# Altium PCB Servo control board.PcbDoc
Units mm, origin at the board's own origin, x right, y up, seen from the top; angles counter-clockwise.
Board outline 61.24 x 50 mm, 2 copper layers (Top Layer, Bottom Layer); 45 components, 60 nets, 190 pads, 0 vias.
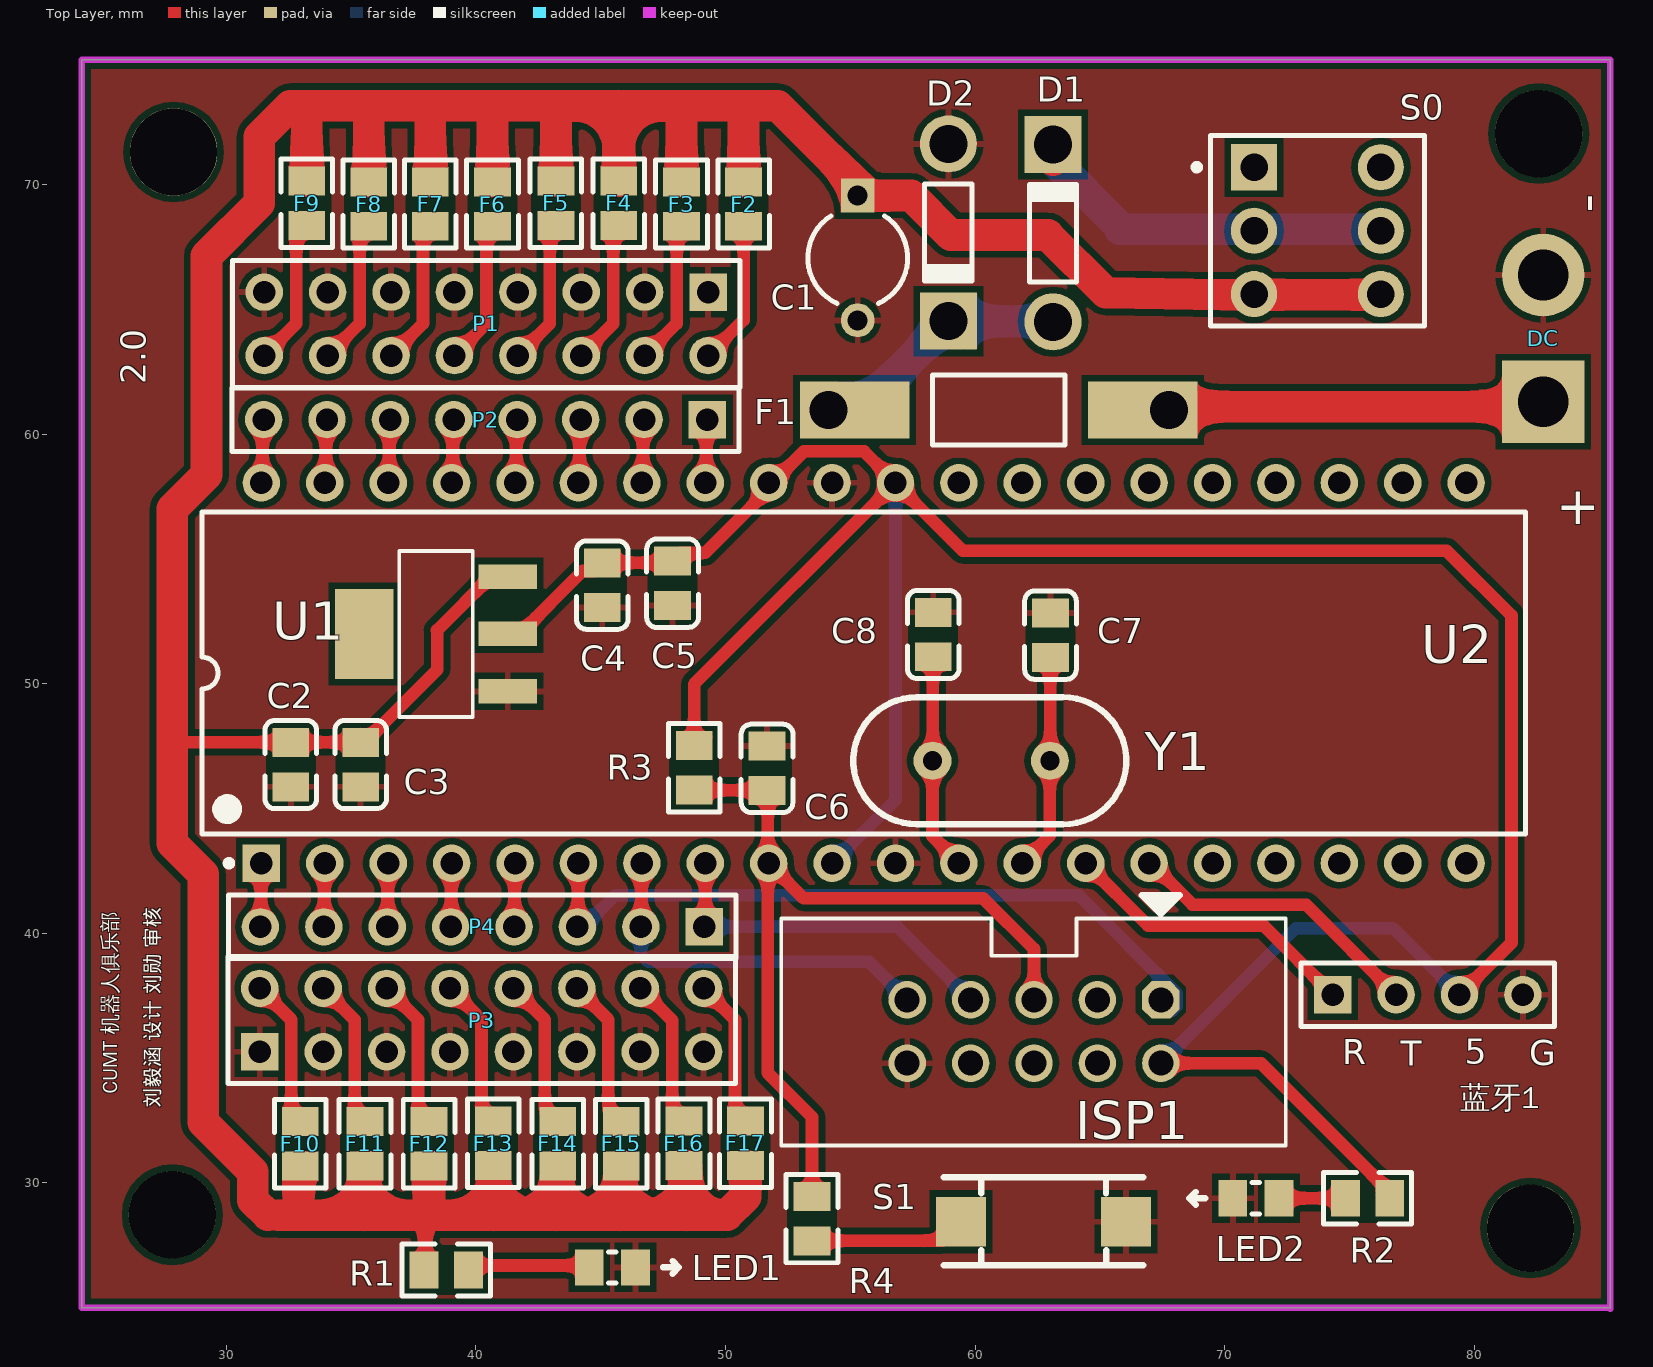
[diagram p0: Top Layer view]
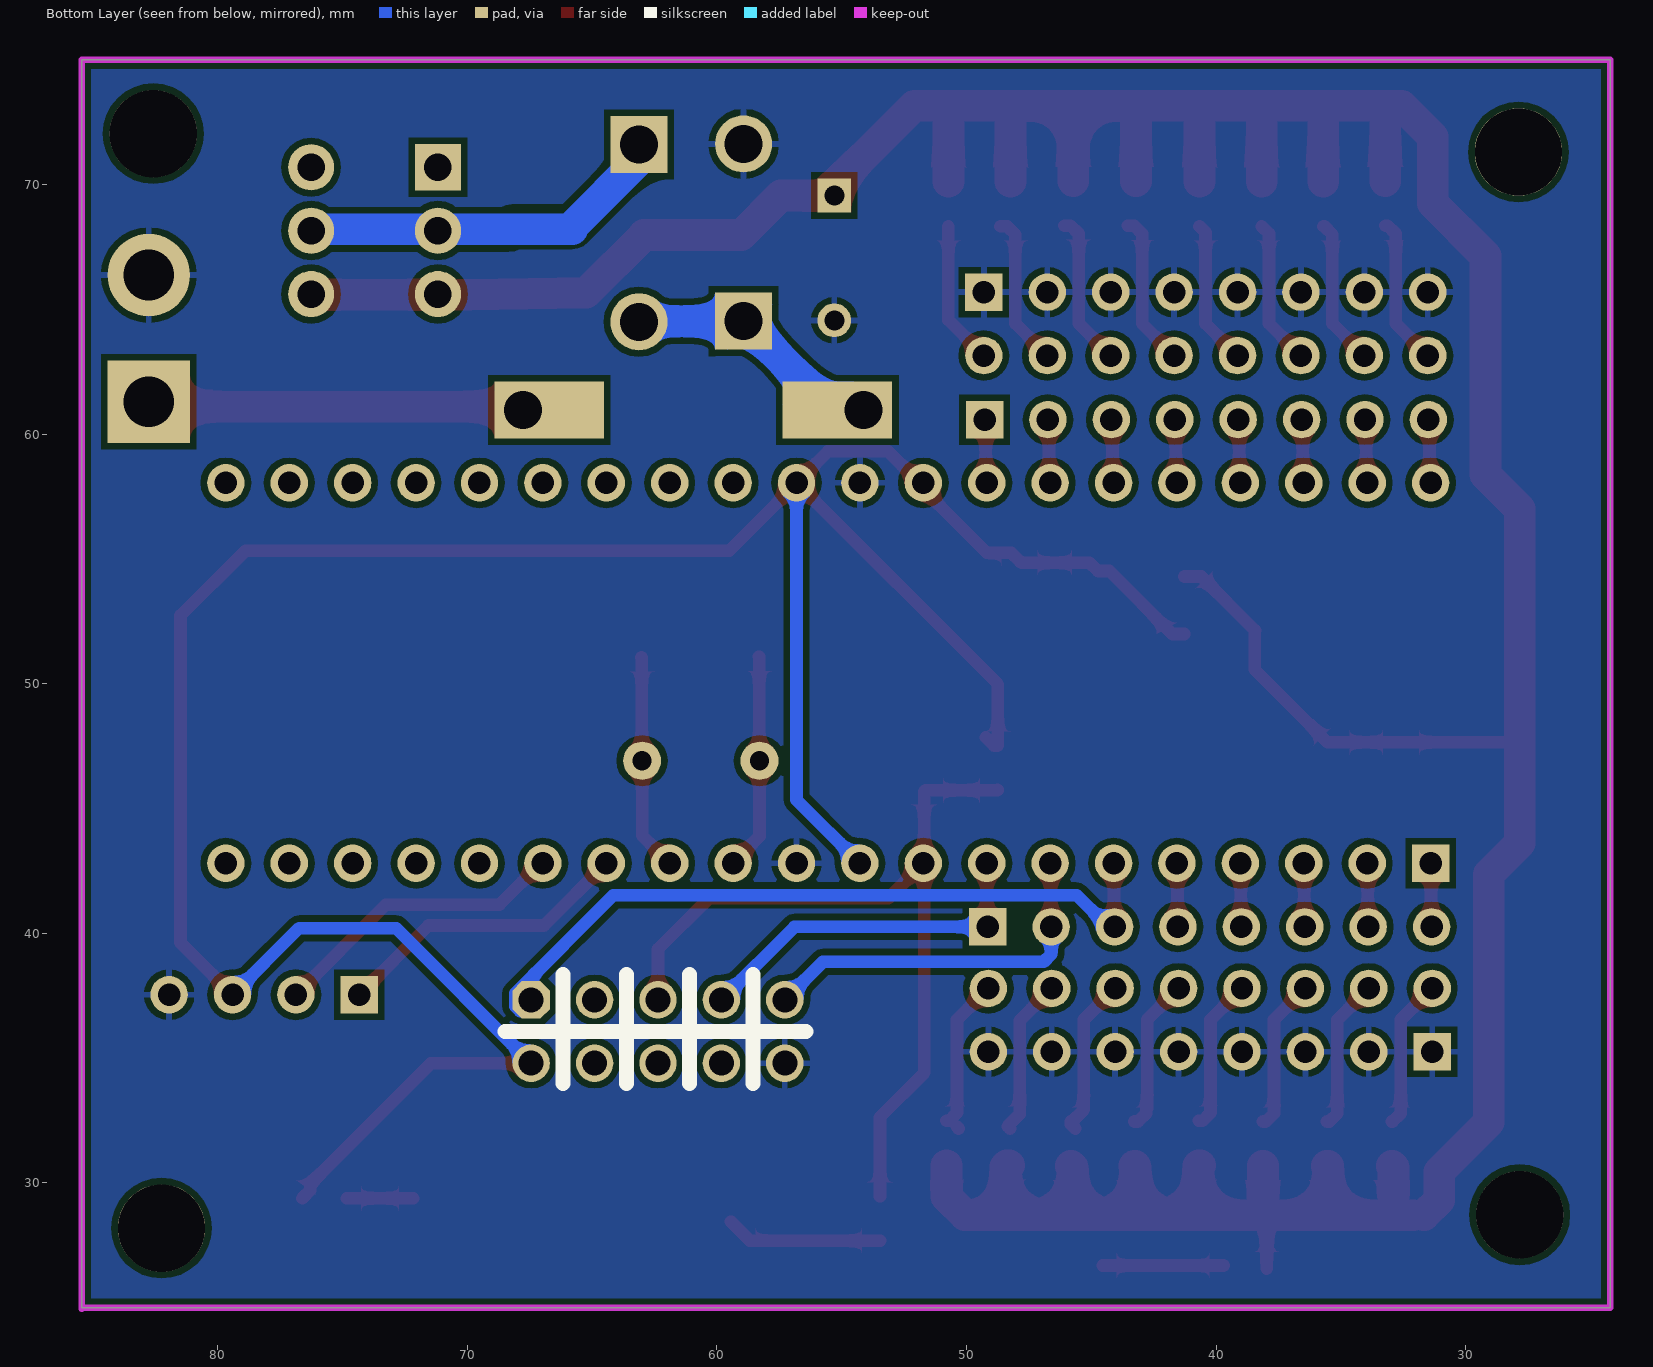
[diagram p1: Bottom Layer view, seen from below]
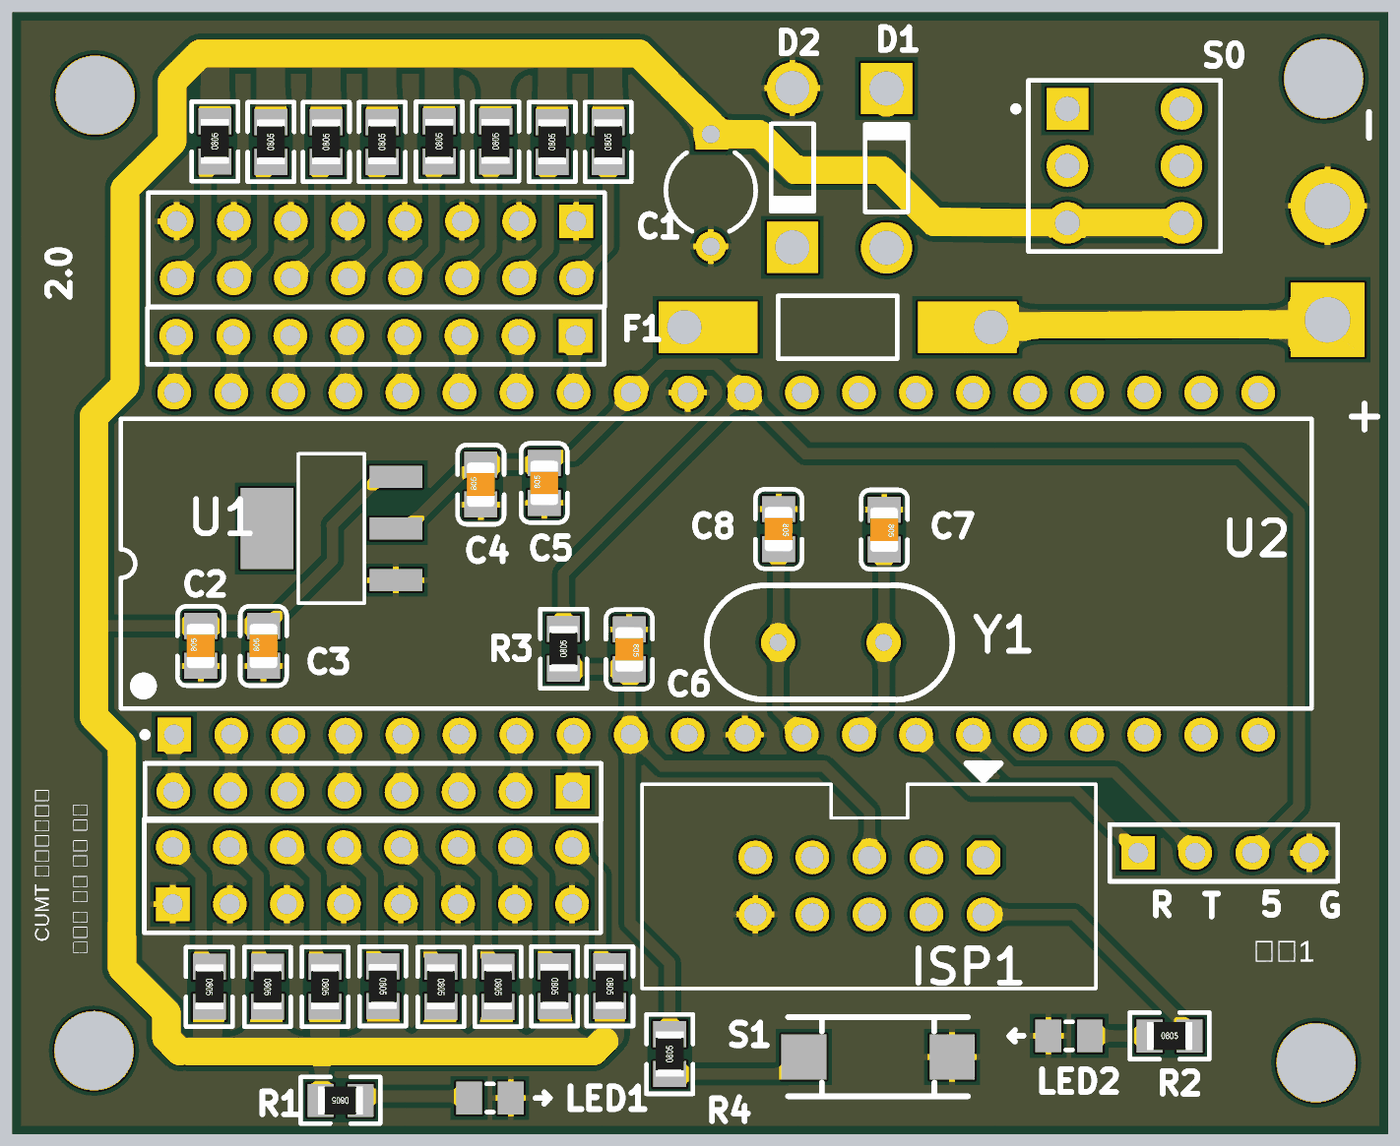
[diagram p2: 3D render of the assembled board from above, using the file's embedded part models]

## Layer stack, top to bottom
Top Solder: solder mask 0.0102, Solder Resist, Dk 3.5
Top Layer: signal copper 0.0356
Dielectric 1: dielectric 0.32, FR-4, Dk 4.8
Bottom Layer: signal copper 0.0356
Bottom Solder: solder mask 0.0102, Solder Resist, Dk 3.5

## Board outline
24.206,25 24.206,75 85.446,75 85.446,25

## Design rules (kind name [scope] priority, off if disabled: settings)
Clearance [All] p1: gap=0.254 ignorepadtopadclearanceinfootprint=TRUE
PolygonConnect [All] p1: connectstyle=Relief reliefconductorwidth=0.254 reliefentries=4 polygonreliefangle="90 Angle" airgapwidth=0.254
RoutingVias [All] p1: holewidth=0.711 width=1.27 viastyle="Through Hole" minholewidth=0.711 minwidth=1.27 maxholewidth=0.711 maxwidth=1.27
SolderMaskExpansion [All] p1: expansion=0.102
Width [All] p1: maxlimit=2.54 minlimit=0.254 preferedwidth=1.27 checkconnectedcopper=TRUE
30 further rules are at their usual default settings.

## Classes and differential pairs
component class 舵机控制板: C2 C3 C4 C5 C6 C7 C8 D1 D2 DC F1 F2 F3 F4 F5 F6 F7 F8 F9 F10 F11 F12 F13 F14 F15 F16 ISP1 LED1 LED2 P1 P2 P3 P4 R1 R2 R3 R4 S0 S1 U1 Y1 蓝牙1

## Components (designator, comment, footprint, x,y, rotation, side; value= is the part's Value field where it differs from the comment)
C1 "直插" CAPR5-4X5 55.296,67.056 r270 top value=470uf
C2 "10uf 0805" 0805_C 32.588,46.761 r90 top
C3 "104 0805" 0805_C 35.382,46.761 r90 top
C4 "104 0805" 0805_C 45.06,53.95 r90 top
C5 "10uf 0805" 0805_C 47.879,54.026 r90 top
C6 "10uf 0805" 0805_C 51.664,46.608 r270 top
C7 "22pf 0402" 0805_C 63.017,51.944 r270 top
C8 "22pf 0402" 0805_C 58.318,51.969 r270 top
D1 "Diode 1N4448" DO-35 63.119,68.047 r90 top
D2 "Schottky Diode SR560 直插" DO-35 58.928,68.072 r270 top
DC "接线端子" 接线端子-仅空 82.753,61.29 r90 top
F1 "玻璃管保险丝 3A" PIN-W2/E2.8 59.944,60.96 r180 top
F2 "500MA 0805" 0805_R 50.724,69.215 r90 top
F3 "500MA 0805" 0805_R 48.235,69.215 r90 top
F4 "500MA 0805" 0805_R 45.72,69.24 r90 top
F5 "500MA 0805" 0805_R 43.205,69.24 r90 top
F6 "500MA 0805" 0805_R 40.665,69.215 r90 top
F7 "500MA 0805" 0805_R 38.176,69.215 r90 top
F8 "500MA 0805" 0805_R 35.712,69.215 r90 top
F9 "500MA 0805" 0805_R 33.223,69.24 r90 top
F10 "500MA 0805" 0805_R 32.969,31.572 r270 top
F11 "500MA 0805" 0805_R 35.56,31.572 r270 top
F12 "500MA 0805" 0805_R 38.125,31.572 r270 top
F13 "500MA 0805" 0805_R 40.691,31.598 r270 top
F14 "500MA 0805" 0805_R 43.282,31.572 r270 top
F15 "500MA 0805" 0805_R 45.822,31.572 r270 top
F16 "500MA 0805" 0805_R 48.336,31.598 r270 top
F17 "500MA 0805" 0805_R 50.8,31.598 r270 top
ISP1 "IDC-10P" IDC2.54-10P 67.437,37.338 r180 top
LED1 "0805" LED贴片 45.466,26.619 r0 top
LED2 "0402" LED贴片 71.247,29.388 r180 top
P1 "Header 8X2" HDR2X8 49.301,65.684 r180 top
P2 "Header 8" HDR1X8 49.276,60.579 r180 top
P3 "Header 8X2" HDR2X8 31.344,35.255 r0 top
P4 "Header 8" HDR1X8 49.149,40.259 r180 top
R1 "10k  0402" 0805_R 38.811,26.518 r180 top
R2 "10k  0402" 0805_R 75.717,29.388 r0 top
R3 "10K 0402" 0805_R 48.743,46.633 r90 top
R4 "1k 0402" 0805_R 53.467,28.575 r90 top
S0 "六角自锁开关" DPDT-6 73.711,68.148 r0 top
S1 "轻触开关（3*6*2.5mm）" 轻触开关（3*6*2.5mm） 62.738,28.448 r180 top
U1 "AMS1117-5V" AMS1117 38.405,51.994 r0 top
U2 "ATmega16A-PU" 40P6 55.538,50.428 r90 top
Y1 "12M 直插" 晶振 60.579,46.914 r90 top
蓝牙1 "Header 4" HDR1X4 74.32,37.541 r0 top

## Footprints (in the part's own frame and the unit in brackets; to place one, negate y for a bottom-side part, rotate by r counter-clockwise, add the part's x,y. Pads: shape width x height; smd on the part's side, far side on the other; paste and mask are expansions set on the pad)
40P6 [mm] "DIP, 40-Leads, Row Spacing 15.24mm, Pitch 2.54mm"
  rect 1.5x1.5 hole 0.9: 1(-7.62,24.13)
  round 1.5 hole 0.9: 2(-7.62,21.59) 3(-7.62,19.05) 4(-7.62,16.51) 5(-7.62,13.97) 6(-7.62,11.43) 7(-7.62,8.89) 8(-7.62,6.35) 9(-7.62,3.81) 10(-7.62,1.27) 11(-7.62,-1.27) 12(-7.62,-3.81) 13(-7.62,-6.35) 14(-7.62,-8.89) 15(-7.62,-11.43) 16(-7.62,-13.97) 17(-7.62,-16.51) 18(-7.62,-19.05) 19(-7.62,-21.59) 20(-7.62,-24.13) 21(7.62,-24.13) 22(7.62,-21.59) 23(7.62,-19.05) 24(7.62,-16.51) 25(7.62,-13.97) 26(7.62,-11.43) 27(7.62,-8.89) 28(7.62,-6.35) 29(7.62,-3.81) 30(7.62,-1.27) 31(7.62,1.27) 32(7.62,3.81) 33(7.62,6.35) 34(7.62,8.89) 35(7.62,11.43) 36(7.62,13.97) 37(7.62,16.51) 38(7.62,19.05) 39(7.62,21.59) 40(7.62,24.13)
  silkscreen extent -7.74,-26.5 6.45,26.5
0805_C [mm]
  rect 1.16x1.47 smd: 1(-0.89,0) 2(0.89,0)
  silkscreen extent -1.77,-1.04 1.77,1.04, body extent -1,-0.62 1,0.63, height 0.77
0805_R [mm]
  rect 1.16x1.47 smd: 1(-0.89,0) 2(0.89,0)
  silkscreen extent -1.77,-1.04 1.77,1.03, body extent -1,-0.62 1,0.63, height 0.49
AMS1117 [mm]
  rect 2.34x0.98 smd: 1(2.87,-2.3) 2(2.87,0) 3(2.87,2.3)
  rect 2.34x3.6 smd: 4(-2.87,0)
  silkscreen extent -1.47,-3.33 1.47,3.33
CAPR5-4X5 [mm] "Capaci"
  rect 1.35x1.35 hole 0.8: 1(-2.5,0)
  round 1.35 hole 0.8: 2(2.5,0)
  silkscreen extent -1.69,-2 1.82,2
DO-35 [mil] "Diode, Axial; Body 3.8 x 1.9 mm (LxDia. max), Lead Dia."
  round 90 hole 60: 1(-139.76,0)
  rect 90x90 hole 60: 2(139.76,0)
  silkscreen extent -77,-37 81,37
DPDT-6 [mm]
  rect 1.85x1.85 hole 1.1: 1(-2.54,2.54)
  round 1.85 hole 1.1: 2(-2.54,0) 3(-2.54,-2.54) 4(2.54,-2.54) 5(2.54,0) 6(2.54,2.54)
  silkscreen extent -4.96,-3.81 4.28,3.81
HDR1X4 [mm] "Connector; Header; 4 Position"
  rect 1.5x1.5 hole 0.9: 1(0,0)
  round 1.5 hole 0.9: 2(2.54,0) 3(5.08,0) 4(7.62,0)
  silkscreen extent -1.27,-1.27 8.89,1.27
HDR1X8 [mm] "Connector; Header; 8 Position"
  rect 1.5x1.5 hole 0.9: 1(0,0)
  round 1.5 hole 0.9: 2(2.54,0) 3(5.08,0) 4(7.62,0) 5(10.16,0) 6(12.7,0) 7(15.24,0) 8(17.78,0)
  silkscreen extent -1.27,-1.27 19.05,1.27
HDR2X8 [mm] "Connector; Header; 8x2 Position"
  rect 1.5x1.5 hole 0.9: 1(0,0)
  round 1.5 hole 0.9: 2(0,2.54) 3(2.54,0) 4(2.54,2.54) 5(5.08,0) 6(5.08,2.54) 7(7.62,0) 8(7.62,2.54) 9(10.16,0) 10(10.16,2.54) 11(12.7,0) 12(12.7,2.54) 13(15.24,0) 14(15.24,2.54) 15(17.78,0) 16(17.78,2.54)
  silkscreen extent -1.27,-1.27 19.05,3.81
IDC2.54-10P [mm]
  oct 1.5x1.5 hole 1: 1(0,0)
  round 1.5 hole 1: 2(0,2.54) 3(2.54,0) 4(2.54,2.54) 5(5.08,0) 6(5.08,2.54) 7(7.62,0) 8(7.62,2.54) 9(10.16,0) 10(10.16,2.54)
  silkscreen extent -5,-4.19 15.2,5.84
LED贴片 [mm]
  rect 1.15x1.45 smd: 1(-0.925,0) 2(0.925,0)
  silkscreen extent -0.15,-0.63 2.67,0.63
PIN-W2/E2.8 [mil] "Thru-H"
  rect 90x90 hole 60: 1(-308.07,0) 2(229.33,0)
  rect 90x90 all layers, no hole: 1(-225,0) 2(146.26,0)
  silkscreen extent -144,-55 65,55
接线端子-仅空 [mil]
  rect 130x130 hole 80: 1(0,0)
  round 130 hole 80: 2(200,0)
  Bottom Layer lines w59.06: 0,5 0,0
晶振 [mil]
  round 60 hole 30: 1(0,90) 2(0,-95)
  silkscreen extent -100,-215 100,215
轻触开关（3*6*2.5mm） [mm]
  rect 2x2 smd: 1(-3.302,0) 2(3.302,0)
  silkscreen extent -4,-1.78 4,1.75

## Part data
C1: library part Cap2, "Capacitor", PackageDescription="Capacitor; 2 Leads", PackageReference=CAPR5-4X5, Published=23-Sep-2002, Publisher="Altium Limited"
C2 C5 C6: library part "0805 C_1"
C3 C4: library part "0805 C"
C7 C8: library part "0805 C_2"
D1: "High Conductance Fast Diode"
D2: library part "Diode 1N4448_1", "High Conductance Fast Diode"
F1: library part "Fuse 1", "Fuse", LatestRevisionDate=17-Jul-2002, LatestRevisionNote="Re-released for DXP Platform.", PackageDescription="Thru-Hole; 2 Leads", PackageReference=PIN-W2/E2.8, Published=8-Jun-2000, Publisher="Altium Limited"
F2 F3 F4 F5 F6 F7 F8 F9 F10 F11 F12 F13 F14 F15 F16 F17: library part "0805 R_2"
LED1 LED2: library part LED贴片
P1 P3: "Header, 8-Pin, Dual row", LatestRevisionDate=17-Jul-2002, LatestRevisionNote="Re-released for DXP Platform.", Publisher="Altium Limited"
P2 P4: "Header, 8-Pin", LatestRevisionDate=17-Jul-2002, LatestRevisionNote="Re-released for DXP Platform.", Publisher="Altium Limited"
R1 R2: library part "0805 R"
R3 R4: library part "0805 R_1"
S0: library part 六脚自锁开关
U1: library part AMS1117
U2: "8-bit AVR Microcontroller, 16KB Flash, 512 Bytes EEPROM, 1KB SRAM, 40-pin PDIP, Industrial Grade (-40癈 to 85癈)"
Y1: library part 晶振
蓝牙1: "Header, 4-Pin", LatestRevisionDate=17-Jul-2002, LatestRevisionNote="Re-released for DXP Platform.", Publisher="Altium Limited"

## Free pads (board coordinates)
  round 3.5 hole 3.5: 1(27.889,71.298) 2(82.575,72.034) 3(82.245,28.194) 4(27.838,28.727)

## Nets (pads, with @x,y where several pads share a name; then routed paths per layer and width w, separated by ;. In a path a pad name is that pad's centre, name@x,y a point inside that pad or via, vN(x,y) a via of type N, cw(c..) or ccw(c..) an arc to the next point about the centre after c; other vN are vias at no path point)
5V: C4.2 C5.2 ISP1.2 R2.2 R3.2 U1.2 U2.10 U2.30 U2.32 蓝牙1.3 | length 119.8
  Top Layer w0.508: U1.2 41.758,51.994 44.277,54.514 44.734,54.514 C4.2 ; C4.2@45.06,54.846 47.809,54.846 C5.2 48.205,55.242 49.183,55.242 51.728,57.787 U2.32 51.876,58.048 53.134,59.306 55.55,59.306 U2.30 ; R3.2@49.224,47.849 48.898,47.523 R3.2 48.743,49.983 U2.30 ; ISP1.2 71.451,34.798 76.281,29.967 76.281,29.714 R2.2 ; 蓝牙1.3 81.483,39.624 81.483,52.73 78.892,55.321 78.765,55.321 59.512,55.321 56.808,58.025 U2.30
  Bottom Layer w0.508: U2.10 56.808,45.348 U2.30 ; ISP1.2 72.847,40.208 76.733,40.208 蓝牙1.3
GND: C1.2 C2.1 C3.1 C4.1 C5.1 C6.1 C7.1 C8.1 D2.1 DC.2 ISP1.10 LED1.2 LED2.2 P1.1 P1.3 P1.5 P1.7 P1.9 P1.11 P1.13 P1.15 P3.1 P3.3 P3.5 P3.7 P3.9 P3.11 P3.13 P3.15 S1.1 U1.1 U2.11 U2.31 蓝牙1.4
MISO: ISP1.9 P4.2 U2.7 | length 15.1
  Top Layer w0.508: P4.2 46.628,40.278 46.628,42.788 U2.7
  Bottom Layer w0.508: P4.2 46.609,39.16 46.907,38.862 55.753,38.862 ISP1.9
MOSI: ISP1.1 P4.3 U2.6 | length 29.5
  Top Layer w0.508: P4.3 44.088,40.278 44.088,42.788 U2.6
  Bottom Layer w0.508: P4.3 44.323,40.259 45.593,41.529 64.144,41.529 68.072,37.601 68.072,37.075 ISP1.1@67.886,36.889
NetD1_1: D1.1 D2.2 F1.2 | length 10.9
  Bottom Layer w1.27: F1.2@54.119,60.96 54.627,61.468 55.874,61.468 D2.2 D1.1@63.525,64.522
NetD1_2: D1.2 S0.2 | length 14.9
  Bottom Layer w1.27: D1.2 63.119,70.987 65.796,68.31 ; 65.796,68.199 76.251,68.199
NetDC_1: DC.1 F1.1 | length 16
  Top Layer w1.27: F1.1@67.769,60.96 67.909,61.1 83.502,61.1 DC.1@83.642,61.239
NetF2_1: F2.1 P1.2 | length 5.8
  Top Layer w0.508: P1.2 50.724,64.567 F2.1
NetF3_1: F3.1 P1.4 | length 6.1
  Top Layer w0.508: P1.4 48.043,64.426 48.043,67.999 48.369,68.325 F3.1@48.641,68.325
NetF4_1: F4.1 P1.6 | length 6.1
  Top Layer w0.508: P1.6 45.503,64.426 45.503,68.024 45.829,68.35 F4.1@46.076,68.35
NetF5_1: F5.1 P1.8 | length 6.1
  Top Layer w0.508: P1.8 42.963,64.426 42.963,68.024 43.289,68.35 F5.1@43.536,68.35
NetF6_1: F6.1 P1.10 | length 5.8
  Top Layer w0.508: P1.10 40.423,64.426 40.423,68.083 F6.1
NetF7_1: F7.1 P1.12 | length 5.8
  Top Layer w0.508: P1.12 37.883,64.426 37.883,68.032 F7.1
NetF8_1: F8.1 P1.14 | length 5.9
  Top Layer w0.508: P1.14 35.343,64.426 35.343,67.999 35.669,68.325 F8.1
NetF9_1: F9.1 P1.16 | length 6
  Top Layer w0.508: P1.16 32.803,64.426 32.803,68.024 33.129,68.35 F9.1
NetF10_1: F10.1 P3.2 | length 6
  Top Layer w0.508: P3.2 32.602,36.537 32.602,32.788 32.928,32.462 F10.1
NetF11_1: F11.1 P3.4 | length 6.1
  Top Layer w0.508: P3.4 35.142,36.537 35.142,32.788 35.468,32.462 F11.1
NetF12_1: F12.1 P3.6 | length 6.1
  Top Layer w0.508: P3.6 37.682,36.537 37.682,32.788 38.008,32.462 F12.1
NetF13_1: F13.1 P3.8 | length 6.1
  Top Layer w0.508: P3.8 40.222,36.537 40.222,32.814 40.548,32.488 F13.1
NetF14_1: F14.1 P3.10 | length 6.2
  Top Layer w0.508: P3.10 42.762,36.537 42.762,32.982 42.801,32.943 42.801,32.788 43.127,32.462 F14.1
NetF15_1: F15.1 P3.12 | length 6.5
  Top Layer w0.508: P3.12 45.302,36.537 45.302,32.931 F15.1@45.822,32.411 ; F15.1@45.644,32.183 45.822,32.361 F15.1@45.822,32.411 ; F15.1 F15.1@45.822,32.411
NetF16_1: F16.1 P3.14 | length 6.4
  Top Layer w0.508: P3.14 47.866,36.513 47.866,32.756 48.35,32.272 F16.1@48.26,32.183
NetF17_1: F17.1 P3.16 | length 6.1
  Top Layer w0.508: P3.16 50.382,36.537 50.382,32.814 50.708,32.488 F17.1 ; F17.1@50.317,32.183 F17.1@50.382,32.247
NetLED1_1: LED1.1 R1.1 | length 4.8
  Top Layer w0.508: R1.1@39.701,26.695 LED1.1@44.541,26.695
NetLED2_1: LED2.1 R2.1 | length 2.7
  Top Layer w0.508: LED2.1 R2.1
NetR4_1: R4.1 S1.2 | length 6.3
  Top Layer w0.508: R4.1 58.673,27.685 S1.2
PA0: P2.8 U2.40 | length 2.6
  Top Layer w0.508: U2.40 31.452,58.092 31.452,60.535 P2.8
PA1: P2.7 U2.39 | length 2.6
  Top Layer w0.508: U2.39 33.992,58.092 33.992,60.535 P2.7
PA2: P2.6 U2.38 | length 2.6
  Top Layer w0.508: U2.38 36.532,58.092 36.532,60.535 P2.6
PA3: P2.5 U2.37 | length 2.6
  Top Layer w0.508: U2.37 39.072,58.092 39.072,60.535 P2.5
PA4: P2.4 U2.36 | length 2.6
  Top Layer w0.508: U2.36 41.612,58.092 41.612,60.535 P2.4
PA5: P2.3 U2.35 | length 2.6
  Top Layer w0.508: U2.35 44.152,58.092 44.152,60.535 P2.3
PA6: P2.2 U2.34 | length 2.6
  Top Layer w0.508: U2.34 46.692,58.092 46.692,60.535 P2.2
PA7: P2.1 U2.33 | length 2.6
  Top Layer w0.508: U2.33 49.232,58.092 49.232,60.535 P2.1
PB0: P4.8 U2.1 | length 2.6
  Top Layer w0.508: P4.8 31.388,40.278 31.388,42.788 U2.1
PB1: P4.7 U2.2 | length 2.6
  Top Layer w0.508: P4.7 33.928,40.278 33.928,42.788 U2.2
PB2: P4.6 U2.3 | length 2.6
  Top Layer w0.508: P4.6 36.468,40.278 36.468,42.788 U2.3
PB3: P4.5 U2.4 | length 2.6
  Top Layer w0.508: P4.5 39.008,40.278 39.008,42.788 U2.4
PB4: P4.4 U2.5 | length 2.6
  Top Layer w0.508: P4.4 41.548,40.278 41.548,42.788 U2.5
PB7: ISP1.7 P4.1 U2.8 | length 14.4
  Top Layer w0.254: P4.1 P4.1@49.188,40.298
  Top Layer w0.508: P4.1@49.188,40.298 U2.8
  Bottom Layer w0.508: P4.1 56.896,40.259 ISP1.7
PC0: U2.22
PC1: U2.23
PC2: U2.24
PC3: U2.25
PC4: U2.26
PC5: U2.27
PC6: U2.28
PC7: U2.29
PD0: U2.14 蓝牙1.1 | length 12.3
  Top Layer w0.508: U2.14 66.921,40.315 71.547,40.315 蓝牙1.1
  Bottom Layer w0.508: U2.14 U2.14@64.507,42.808 ; 蓝牙1.1@74.625,37.516 蓝牙1.1@74.752,37.389
PD1: U2.15 蓝牙1.2 | length 12.1
  Top Layer w0.508: U2.15 67.047,42.808 68.707,41.148 73.254,41.148 蓝牙1.2
PD2: U2.16
PD3: U2.17
PD4: U2.18
PD5: U2.19
PD6: U2.20
PD7: U2.21
RESET: C6.2 ISP1.5 R3.1 R4.2 U2.9 | length 34
  Top Layer w0.508: R3.1 48.755,45.731 51.651,45.731 C6.2 51.696,45.686 51.696,42.84 U2.9 ; R4.2 53.467,32.639 51.689,34.417 51.689,42.769 U2.9 ; ISP1.5 62.357,39.37 60.325,41.402 53.134,41.402 U2.9
VCC: C1.1 C2.2 C3.2 F2.2 F3.2 F4.2 F5.2 F6.2 F7.2 F8.2 F9.2 F10.2 F11.2 F12.2 F13.2 F14.2 F15.2 F16.2 F17.2 R1.2 S0.3 U1.3 | length 173.5
  Top Layer w0.508: 27.838,47.473 28.017,47.651 C2.2 C3.2 35.537,47.651 38.456,50.57 38.456,52.155 ; R1.2@37.976,26.573 37.976,28.604 ; 38.439,52.138 38.456,52.155 ; U1.3 40.595,54.294 38.456,52.155
  Top Layer w1.27: 31.674,28.702 31.064,29.312 31.064,30.455 29.083,32.436 29.083,42.367 27.838,43.612 27.838,47.473 27.838,56.998 29.21,58.369 29.21,67.132 31.318,69.24 31.318,71.907 32.563,73.152 33.426,73.152 ; 32.08,28.702 32.893,28.702 ; F10.2 32.948,30.682 32.893,30.627 32.893,28.702 ; F9.2 33.223,72.949 33.426,73.152 ; F11.2@35.515,30.682 F11.2 35.509,30.631 35.509,28.702 ; F8.2 35.712,73.025 35.839,73.152 ; 37.976,28.604 38.075,28.702 40.716,28.702 ; 37.976,28.702 35.509,28.702 ; 38.125,28.753 F12.2 ; F7.2 38.176,73.05 38.075,73.152 ; F13.2@40.646,30.708 F13.2 40.716,30.682 40.716,28.702 ; F6.2 40.665,73.127 40.691,73.152 ; F5.2 43.205,73.127 43.18,73.152 ; F14.2@43.237,30.682 F14.2 43.231,30.631 43.231,28.702 ; F4.2 45.72,73.152 ; F15.2 45.8,30.682 45.745,30.627 45.745,28.702 ; F3.2 48.235,73.05 48.133,73.152 ; F16.2@48.291,30.708 F16.2 48.381,30.708 48.436,30.653 48.436,30.608 48.438,30.606 48.438,28.702 ; F2.2 50.724,72.923 50.495,73.152 ; F17.2 50.8,29.446 50.056,28.702 48.438,28.702 ; 76.302,65.583 69.926,65.583 65.227,65.659 62.916,67.97 59.03,67.97 57.444,69.556 C1.1 55.296,69.952 52.095,73.152 50.495,73.152 ; 32.893,28.702 35.509,28.702 ; 33.426,73.152 35.839,73.152 ; 35.839,73.152 38.075,73.152 ; 38.075,73.152 40.691,73.152 ; 40.691,73.152 43.18,73.152 ; 40.716,28.702 43.231,28.702 ; 43.18,73.152 45.72,73.152 ; 43.231,28.702 45.745,28.702 ; 45.72,73.152 48.133,73.152 ; 45.745,28.702 48.438,28.702 ; 48.133,73.152 50.495,73.152
XTAL1: C7.2 U2.13 Y1.2 | length 8.7
  Top Layer w0.508: U2.13 62.992,43.912 Y1.2 63.005,46.926 63.005,51.041 C7.2
XTAL2: C8.2 U2.12 Y1.1 | length 8.7
  Top Layer w0.508: C8.2 58.306,51.067 58.306,46.926 Y1.1 58.293,43.891 59.348,42.836 U2.12
pads on no net: ISP1.3 ISP1.4 ISP1.6 ISP1.8 S0.1 S0.4 S0.5 S0.6 U1.4
copper on no net: | length 0.8
  Top Layer w1.27: 63.119,70.968 63.119,71.597
  Bottom Layer w0.508: 67.31,37.338 67.437,37.338

## Polygon pours and split planes (outlines as drawn)
no net on Top Overlay (solid): 82.677,38.227
GND on Top Layer "Top Layer-GND 1" (solid, remove dead copper, pour order 84): 24.054,75.159 24.212,75 85.446,75 85.446,24.949 85.395,25 24.206,25 24.206,75
no net on Top Layer "Top Layer-No Net 2" (solid, remove dead copper, pour order 78): 24.206,75 24.206,25
no net on Top Layer "Top Layer-No Net 1" (solid, remove dead copper, pour order 44): 24.054,75.159
GND on Top Layer "Top Layer-GND" (solid, remove dead copper, pour order 22): 76.403,24.384
no net on Top Layer "Top Layer-No Net" (solid, pour order 6): 24.206,75
GND on Bottom Layer "Bottom Layer-GND" (solid, remove dead copper, pour order 86): 24.206,75 85.446,75 85.446,25 24.206,25 24.206,75.159 24.282,75.235

## Keep-outs
Keep-Out Layer:
  lines w0.254: 85.446,24.949 85.446,37.525 85.446,62.525 85.446,74.949 ; 85.446,25 24.206,25 24.206,75 85.446,75

## Silkscreen, mask and mechanical layers (free items; w line width, h text height)
Top Overlay:
  text "-" at 85.192,68.859 h1.52 r90
  text "2.0" at 26.772,62.001 h1.02 r90
  text "+" at 83.287,56.388 h1.52
  text "5" at 79.604,34.773 h1.02
  text "R" at 74.701,34.747 h1.02
  text "G" at 82.194,34.722 h1.02
  text "T" at 77.038,34.696 h1.02
  text "CUMT 机器人俱乐部" at 25.832,33.579 h1.02 r90
  text "刘毅涵 设计 刘勋 审核" at 27.534,32.995 h1.02 r90
Top Solder:
  lines w1.27: 50.546,29.134 50.089,28.677 31.648,28.677 31.064,29.261 31.064,30.404 29.083,32.385 29.083,32.639 29.083,33.757 29.083,33.782 29.058,33.807 29.058,42.393 27.838,43.612 27.838,56.998 29.21,58.369 29.21,67.107 31.318,69.215 31.318,71.907 32.563,73.152 32.563,73.177 52.095,73.177 55.321,69.952 ; 54.119,60.96 55.366,60.96 ; 55.296,69.556 57.495,69.556 59.106,67.945 62.89,67.945 62.916,67.945 65.202,65.659 76.251,65.659 ; 62.611,71.476 62.611,71.622 ; 67.794,60.985 81.686,61.087
Bottom Solder:
  lines w1.27: 55.417,60.96 58.953,64.497 63.119,64.497 ; 63.119,71.597 63.119,70.942 65.913,68.148 76.251,68.148